# Altium PCB all_Slaveboard_2020.PcbDoc
Units mm, origin at the board's own origin, x right, y up, seen from the top; angles counter-clockwise.
Board outline 150 x 100 mm, 8 copper layers (Top Layer, GND, SIG03, SIG04, Int4 (Sign), SIG06, PWR, Bottom Layer), stack 1.535 mm thick; 98 components, 233 nets, 1115 pads, 5 vias.
Unrouted connection lines stored in the file: 524.
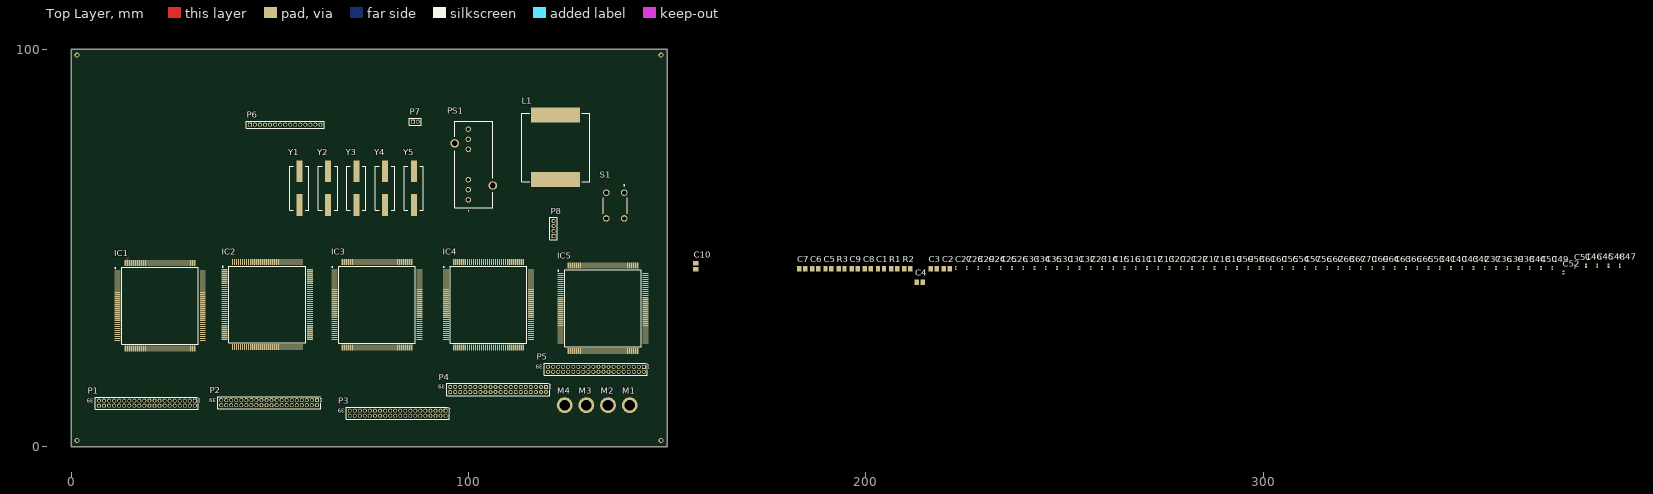
[diagram p0: Top Layer view]
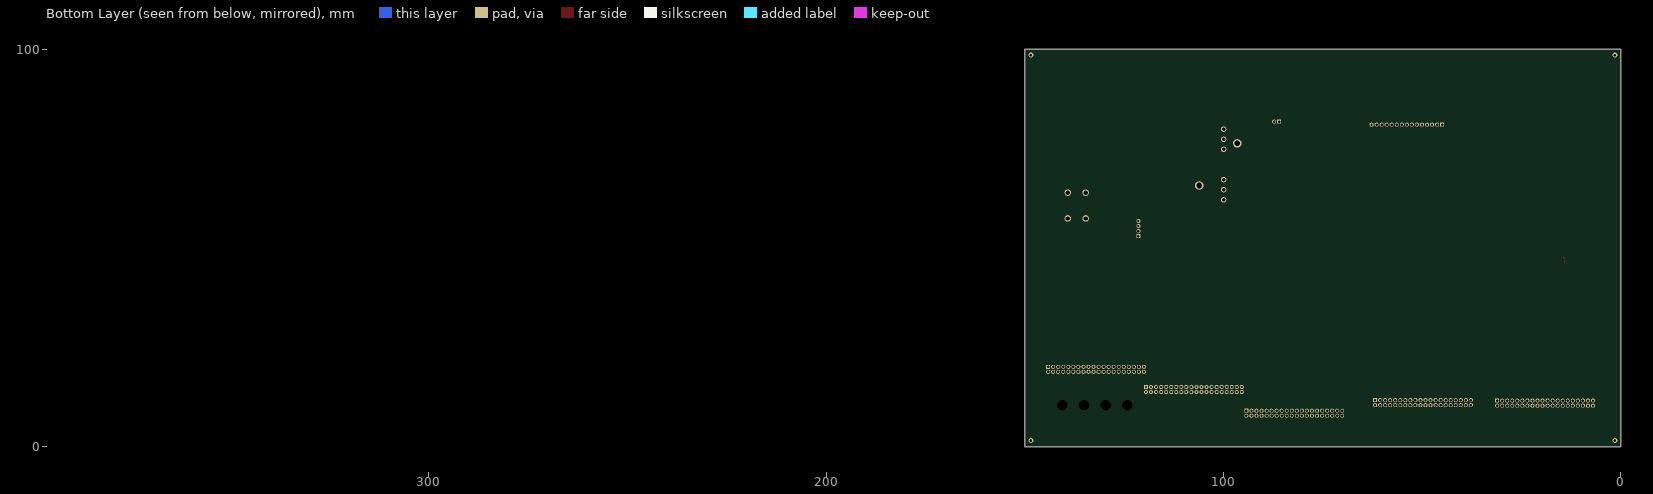
[diagram p1: Bottom Layer view, seen from below]
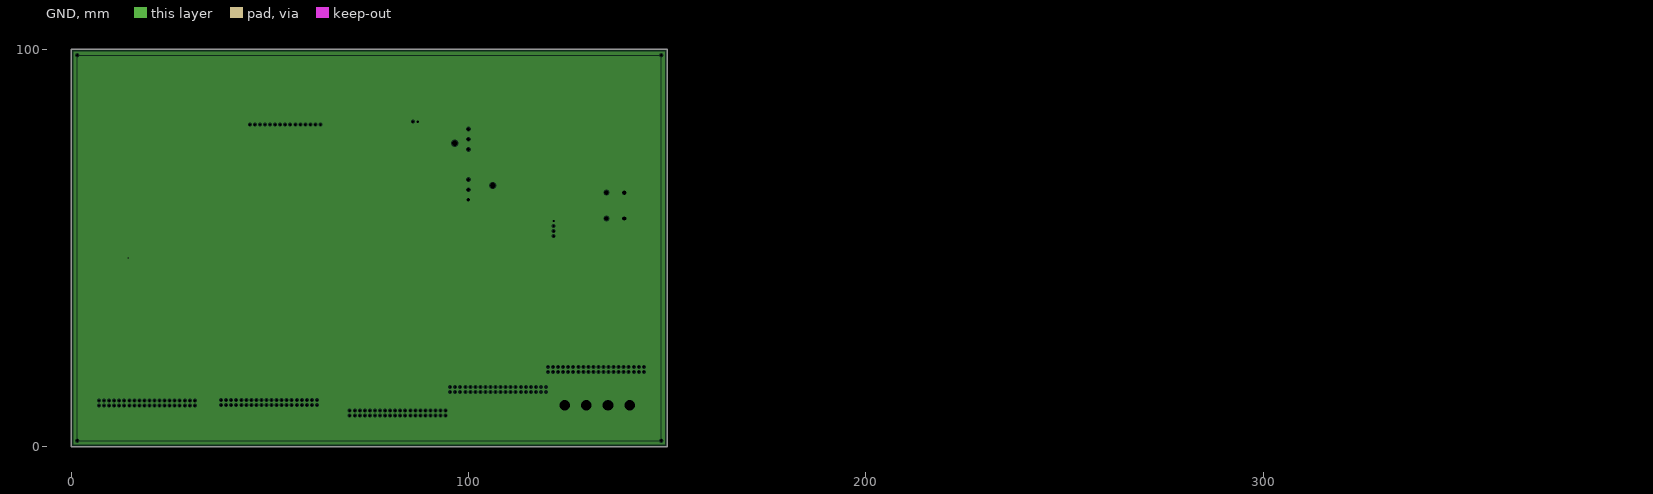
[diagram p2: GND, clearances drawn from the general rule]
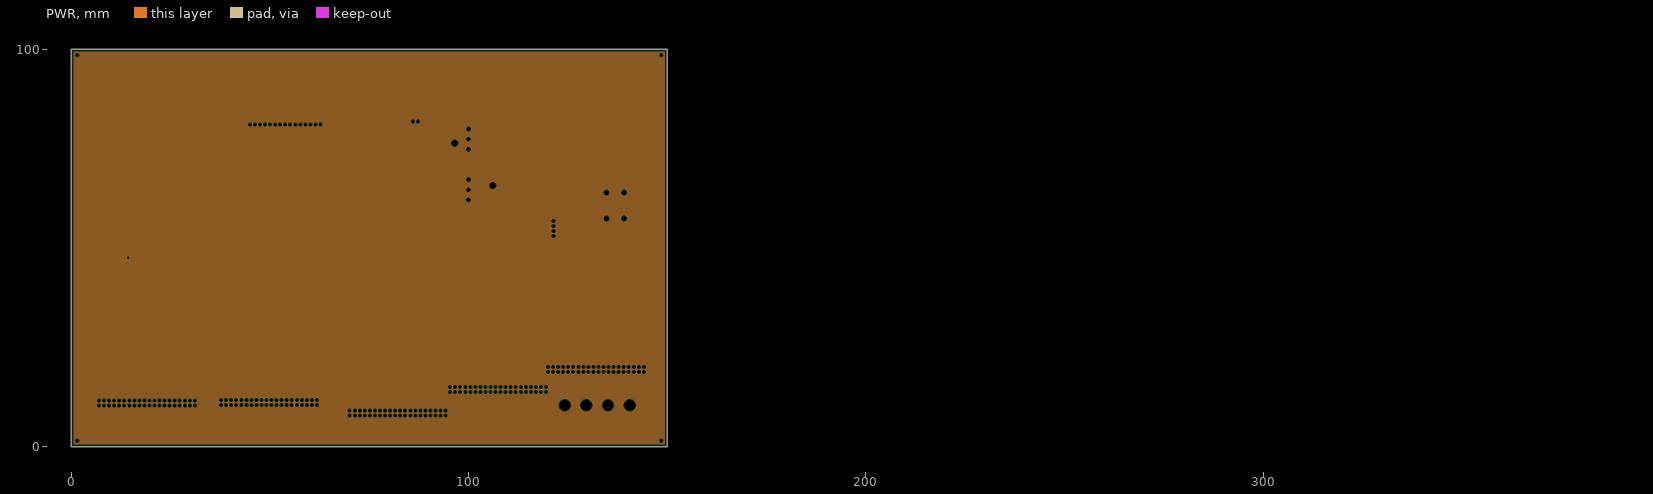
[diagram p3: PWR, clearances drawn from the general rule]

## Layer stack, top to bottom
Top Solder: solder mask 0.0254, SM-001, Dk 4
Top Layer: signal copper 0.035
Dielectric 1: prepreg 0.0711, PP-006, Dk 4.1
Dielectric 2: prepreg 0.0711, PP-006, Dk 4.1
GND: plane copper 0.035, net GND
Dielectric 3: core 0.2286, Core-027, Dk 4.5
SIG03: signal copper 0.035
Dielectric 4: prepreg 0.0711, PP-006, Dk 4.1
Dielectric 5: prepreg 0.0711, PP-006, Dk 4.1
SIG04: signal copper 0.035
Dielectric 6: core 0.2286, Core-027, Dk 4.5
Int4 (Sign): signal copper 0.035
Dielectric 7: prepreg 0.0711, PP-006, Dk 4.1
Dielectric 8: prepreg 0.0711, PP-006, Dk 4.1
SIG06: signal copper 0.035
Dielectric 9: core 0.2286, Core-027, Dk 4.5
PWR: plane copper 0.035
Dielectric 10: prepreg 0.0711, PP-006, Dk 4.1
Dielectric 11: prepreg 0.0711, PP-006, Dk 4.1
Bottom Layer: signal copper 0.035
Bottom Solder: solder mask 0.0254, SM-001, Dk 4

## Board outline
0,0 0,100 150,100 150,0

## Design rules (kind name [scope] priority, off if disabled: settings)
Clearance [istrack>(InDifferentialPairClass('All Differential Pairs')) vs (IsTrack)] p1: gap=0.305 ignorepadtopadclearanceinfootprint=TRUE except(0: Arc-Hole Track-Hole SMDPad-Hole THPad-Hole Via-Hole Fill-Hole Poly-Hole Region-Hole Text-Hole)
Clearance All [All] p2: gap=0.114 ignorepadtopadclearanceinfootprint=TRUE except(0: Arc-Hole Track-Hole SMDPad-Hole THPad-Hole Via-Hole Fill-Hole Poly-Hole Region-Hole Text-Hole)
Clearance Via_Poly [IsVia vs inpoly] p3: gap=0.127 ignorepadtopadclearanceinfootprint=TRUE except(0: Arc-Hole Track-Hole SMDPad-Hole THPad-Hole Via-Hole Fill-Hole Poly-Hole Region-Hole Text-Hole)
Clearance Poly [Isvia vs (InPolygon)] p4: gap=0.254 ignorepadtopadclearanceinfootprint=TRUE except(0: Arc-Hole Track-Hole SMDPad-Hole THPad-Hole Via-Hole Fill-Hole Poly-Hole Region-Hole Text-Hole)
PlaneClearance [All] p1: clearance=0.203
PlaneConnect [All] p1: planeconnectstyle=Relief reliefexpansion=0.152 reliefentries=4 reliefconductorwidth=0.254 reliefairgap=0.203
PolygonConnect [All] p1: connectstyle=Relief reliefconductorwidth=0.254 reliefentries=4 polygonreliefangle="90 Angle" airgapwidth=0.254
PolygonConnect PolygonConnect_Via [IsVia] p2: connectstyle=Direct reliefconductorwidth=0.254 reliefentries=4 polygonreliefangle="90 Angle" airgapwidth=0.254
RoutingVias [All] p1: holewidth=0.2 width=0.4 viastyle="Through Hole" minholewidth=0.2 minwidth=0.4 maxholewidth=0.2 maxwidth=0.4
SolderMaskExpansion [All] p1: expansion=0.102 istentingtop=FALSE
Width Diff_pair [(InDifferentialPairClass('100'))] p1: maxlimit=0.114 minlimit=0.114 preferedwidth=0.114
Width Width_1 [All] p2: maxlimit=1.524 minlimit=0.152 preferedwidth=0.152 minimp=50.000000 maximp=50.000000 favimp=50.000000
Width PWR [InNetClass('PWR')] p3: maxlimit=1.524 minlimit=0.254 preferedwidth=0.305
28 further rules are at their usual default settings.

## Components (designator, comment, footprint, x,y, rotation, side; value= is the part's Value field where it differs from the comment)
C1 "30pF" c0805 203.847,44.791 r0 top
C2 "30pF" c0805 220.403,44.791 r0 top
C3 "30pF" c0805 217.092,44.791 r0 top
C4 "30pF" c0805 213.626,41.402 r0 top
C5 "30pF" c0805 190.602,44.791 r0 top
C6 "30pF" c0805 187.291,44.791 r0 top
C7 "30pF" c0805 183.98,44.791 r0 top
C8 "30pF" c0805 200.536,44.791 r0 top
C9 "30pF" c0805 197.225,44.791 r0 top
C10 "30pF" c0805 157.226,45.339 r90 top
C11 "100nF" c0201 267.967,44.931 r90 top
C12 "100nF" c0201 270.8,44.931 r90 top
C13 "100nF" c0201 273.634,44.931 r90 top
C14 "100nF" c0201 259.465,44.931 r90 top
C15 "100nF" c0201 262.299,44.931 r90 top
C16 "100nF" c0201 265.133,44.931 r90 top
C17 "100nF" c0201 284.97,44.931 r90 top
C18 "100nF" c0201 287.804,44.931 r90 top
C19 "100nF" c0201 290.638,44.931 r90 top
C20 "100nF" c0201 276.468,44.931 r90 top
C21 "100nF" c0201 279.302,44.931 r90 top
C22 "100nF" c0201 282.136,44.931 r90 top
C23 "100nF" c0201 256.631,44.931 r90 top
C24 "100nF" c0201 231.126,44.931 r90 top
C25 "100nF" c0201 233.96,44.931 r90 top
C26 "100nF" c0201 236.794,44.931 r90 top
C27 "100nF" c0201 222.624,44.931 r90 top
C28 "100nF" c0201 225.458,44.931 r90 top
C29 "100nF" c0201 228.292,44.931 r90 top
C30 "100nF" c0201 248.129,44.931 r90 top
C31 "100nF" c0201 250.963,44.931 r90 top
C32 "100nF" c0201 253.797,44.931 r90 top
C33 "100nF" c0201 239.628,44.931 r90 top
C34 "100nF" c0201 242.461,44.931 r90 top
C35 "100nF" c0201 245.295,44.931 r90 top
C36 "100nF" c0201 358.651,44.931 r90 top
C37 "100nF" c0201 355.817,44.931 r90 top
C38 "100nF" c0201 364.319,44.931 r90 top
C39 "100nF" c0201 361.485,44.931 r90 top
C40 "100nF" c0201 347.316,44.931 r90 top
C41 "100nF" c0201 344.482,44.931 r90 top
C42 "100nF" c0201 352.983,44.931 r90 top
C43 "100nF" c0201 350.15,44.931 r90 top
C44 "100nF" c0201 367.153,44.931 r90 top
C45 "100nF" c0201 384.156,45.512 r90 top
C46 "100nF" c0201 381.322,45.512 r90 top
C47 "100nF" c0201 389.824,45.512 r90 top
C48 "100nF" c0201 386.99,45.512 r90 top
C49 "100nF" c0201 372.821,44.931 r90 top
C50 "100nF" c0201 369.987,44.931 r90 top
C51 "100nF" c0201 378.489,45.385 r90 top
C52 "100nF" c0201 375.655,43.788 r90 top
C53 "100nF" c0201 341.648,44.931 r90 top
C54 "100nF" c0201 307.641,44.931 r90 top
C55 "100nF" c0201 304.807,44.931 r90 top
C56 "100nF" c0201 313.309,44.931 r90 top
C57 "100nF" c0201 310.475,44.931 r90 top
C58 "100nF" c0201 296.306,44.931 r90 top
C59 "100nF" c0201 293.472,44.931 r90 top
C60 "100nF" c0201 301.973,44.931 r90 top
C61 "100nF" c0201 299.139,44.931 r90 top
C62 "100nF" c0201 316.143,44.931 r90 top
C63 "100nF" c0201 333.146,44.931 r90 top
C64 "100nF" c0201 330.312,44.931 r90 top
C65 "100nF" c0201 338.814,44.931 r90 top
C66 "100nF" c0201 335.98,44.931 r90 top
C67 "1nF" c0201 321.811,44.931 r90 top
C68 "1nF" c0201 318.977,44.931 r90 top value=10uF
C69 "1nF" c0201 327.478,44.931 r90 top
C70 "1nF" c0201 324.645,44.931 r90 top
IC1 "STM32F303ZET6" f303QFP50P2200X2200X160-144N 22.352,35.433 r0 top
IC2 "STM32F303ZET6" f303QFP50P2200X2200X160-144N 49.333,35.747 r0 top
IC3 "STM32F303ZET6" f303QFP50P2200X2200X160-144N 76.962,35.687 r0 top
IC4 "STM32F303ZET6" f303QFP50P2200X2200X160-144N 105.029,35.687 r0 top
IC5 "STM32F303ZET6" f303QFP50P2200X2200X160-144N 133.858,34.798 r0 top
L1 "IHLP6767GZER220M01" FP-IHLP-6767GZ-FP_3_825x1-MFG 121.92,75.311 r90 top
M1 "HOLE2R7-4" HOLE2R7-4 140.589,10.414 r0 top
M2 "HOLE2R7-4" HOLE2R7-4 135.128,10.414 r0 top
M3 "HOLE2R7-4" HOLE2R7-4 129.667,10.414 r0 top
M4 "HOLE2R7-4" HOLE2R7-4 124.206,10.414 r0 top
P1 "MHDR2X20" MHDR2X20 31.115,11.557 r180 top
P2 "MHDR2X20" MHDR2X20 61.849,11.684 r180 top
P3 "MHDR2X20" MHDR2X20 94.234,9.017 r180 top
P4 "MHDR2X20" MHDR2X20 119.507,14.986 r180 top
P5 "MHDR2X20" MHDR2X20 144.145,20.066 r180 top
P6 "MHDR1X15" MHDR1X15 44.958,81.026 r0 top
P7 "MHDR1X2" MHDR1X2 85.979,81.788 r0 top
P8 "MHDR1X4" MHDR1X4 121.412,52.959 r90 top
PS1 "TMR_6-2415WIR" TMR62410WIR 99.949,62.103 r90 top
R1 "10K" C0805 207.158,44.791 r0 top value=100K
R2 "10K" C0805 210.469,44.791 r0 top
R3 "10k" C0805 193.913,44.791 r0 top
S1 "B3F-1025" B3F1025 139.192,63.904 r90 top
Y1 "ATS08ASM-1E" ATS040SM1 57.404,65.024 r90 top
Y2 "ATS08ASM-1E" ATS040SM1 64.643,65.024 r90 top
Y3 "ATS08ASM-1E" ATS040SM1 71.755,65.024 r90 top
Y4 "ATS08ASM-1E" ATS040SM1 78.994,65.024 r90 top
Y5 "ATS08ASM-1E" ATS040SM1 86.233,65.024 r90 top

## Footprints (in the part's own frame and the unit in brackets; to place one, negate y for a bottom-side part, rotate by r counter-clockwise, add the part's x,y. Pads: shape width x height; smd on the part's side, far side on the other; paste and mask are expansions set on the pad)
ATS040SM1 [mm]
  rect 5.5x1.5 smd: 1(-4.25,0) 2(4.25,0)
  silkscreen extent -5.55,-2.41 5.55,2.41, body extent -6.85,-2.41 6.85,2.41, height 4.4
B3F1025 [mm]
  round 1.65 hole 1.1: 1(0,0) 2(-6.5,0) 3(0,4.5) 4(-6.5,4.5)
  silkscreen extent -5.25,-0.75 1.95,5.25, body extent -6.95,-0.75 0.45,5.25, height 5.3
c0201 [mm]
  rect 0.46x0.42 smd: 1(-0.3,0) 2(0.33,0)
  body extent -0.3,-0.15 0.3,0.15, height 0.33
c0805 [mm] "Chip Capacitor, Body 2.0x1.3mm, IPC High Density"
  rect 1.1x1.4 smd: 1(-0.75,0) 2(0.75,0)
  body extent -1.1,-0.72 1.1,0.72, height 1.4
C0805 [mm] "Chip Capacitor, Body 2.0x1.3mm, IPC High Density"
  rect 1.1x1.4 smd: 1(-0.75,0) 2(0.75,0)
  body extent -1.1,-0.72 1.1,0.72, height 1.4
f303QFP50P2200X2200X160-144N [mm]
  rect 1.475x0.3 smd: 1(-10.738,8.75) 2(-10.738,8.25) 3(-10.738,7.75) 4(-10.738,7.25) 5(-10.738,6.75) 6(-10.738,6.25) 7(-10.738,5.75) 8(-10.738,5.25) 9(-10.738,4.75) 10(-10.738,4.25) 11(-10.738,3.75) 12(-10.738,3.25) 13(-10.738,2.75) 14(-10.738,2.25) 15(-10.738,1.75) 16(-10.738,1.25) 17(-10.738,0.75) 18(-10.738,0.25) 19(-10.738,-0.25) 20(-10.738,-0.75) 21(-10.738,-1.25) 22(-10.738,-1.75) 23(-10.738,-2.25) 24(-10.738,-2.75) 25(-10.738,-3.25) 26(-10.738,-3.75) 27(-10.738,-4.25) 28(-10.738,-4.75) 29(-10.738,-5.25) 30(-10.738,-5.75) 31(-10.738,-6.25) 32(-10.738,-6.75) 33(-10.738,-7.25) 34(-10.738,-7.75) 35(-10.738,-8.25) 36(-10.738,-8.75) 73(10.738,-8.75) 74(10.738,-8.25) 75(10.738,-7.75) 76(10.738,-7.25) 77(10.738,-6.75) 78(10.738,-6.25) 79(10.738,-5.75) 80(10.738,-5.25) 81(10.738,-4.75) 82(10.738,-4.25) 83(10.738,-3.75) 84(10.738,-3.25) 85(10.738,-2.75) 86(10.738,-2.25) 87(10.738,-1.75) 88(10.738,-1.25) 89(10.738,-0.75) 90(10.738,-0.25) 91(10.738,0.25) 92(10.738,0.75) 93(10.738,1.25) 94(10.738,1.75) 95(10.738,2.25) 96(10.738,2.75) 97(10.738,3.25) 98(10.738,3.75) 99(10.738,4.25) 100(10.738,4.75) 101(10.738,5.25) 102(10.738,5.75) 103(10.738,6.25) 104(10.738,6.75) 105(10.738,7.25) 106(10.738,7.75) 107(10.738,8.25) 108(10.738,8.75)
  rect 0.3x1.475 smd: 37(-8.75,-10.738) 38(-8.25,-10.738) 39(-7.75,-10.738) 40(-7.25,-10.738) 41(-6.75,-10.738) 42(-6.25,-10.738) 43(-5.75,-10.738) 44(-5.25,-10.738) 45(-4.75,-10.738) 46(-4.25,-10.738) 47(-3.75,-10.738) 48(-3.25,-10.738) 49(-2.75,-10.738) 50(-2.25,-10.738) 51(-1.75,-10.738) 52(-1.25,-10.738) 53(-0.75,-10.738) 54(-0.25,-10.738) 55(0.25,-10.738) 56(0.75,-10.738) 57(1.25,-10.738) 58(1.75,-10.738) 59(2.25,-10.738) 60(2.75,-10.738) 61(3.25,-10.738) 62(3.75,-10.738) 63(4.25,-10.738) 64(4.75,-10.738) 65(5.25,-10.738) 66(5.75,-10.738) 67(6.25,-10.738) 68(6.75,-10.738) 69(7.25,-10.738) 70(7.75,-10.738) 71(8.25,-10.738) 72(8.75,-10.738) 109(8.75,10.738) 110(8.25,10.738) 111(7.75,10.738) 112(7.25,10.738) 113(6.75,10.738) 114(6.25,10.738) 115(5.75,10.738) 116(5.25,10.738) 117(4.75,10.738) 118(4.25,10.738) 119(3.75,10.738) 120(3.25,10.738) 121(2.75,10.738) 122(2.25,10.738) 123(1.75,10.738) 124(1.25,10.738) 125(0.75,10.738) 126(0.25,10.738) 127(-0.25,10.738) 128(-0.75,10.738) 129(-1.25,10.738) 130(-1.75,10.738) 131(-2.25,10.738) 132(-2.75,10.738) 133(-3.25,10.738) 134(-3.75,10.738) 135(-4.25,10.738) 136(-4.75,10.738) 137(-5.25,10.738) 138(-5.75,10.738) 139(-6.25,10.738) 140(-6.75,10.738) 141(-7.25,10.738) 142(-7.75,10.738) 143(-8.25,10.738) 144(-8.75,10.738)
  silkscreen extent -11.35,-9.65 9.65,9.65, body extent -11,-11 11,11, height 1.6
FP-IHLP-6767GZ-FP_3_825x1-MFG [mm]
  rect 3.825x12.32 smd paste+0 mask+0: 1(-8.117,0) 2(8.117,0)
  silkscreen extent -8.64,-8.57 8.64,8.57, body extent -10.13,-8.67 10.13,8.67, height 0.25
HOLE2R7-4 [mm] "HOLE2R7-4"
  round 4 / inner round 1.524 / far side round 1.524 hole 2.7: 1(0,0)
MHDR1X2 [mm] "Connector; Header; 2 Position"
  rect 1x1 hole 0.6: 1(0,0)
  round 1 hole 0.6: 2(1.27,0)
  silkscreen extent -0.9,-0.9 2.17,0.9
MHDR1X4 [mm] "Connector; Header; 4 Position"
  rect 1x1 hole 0.6: 1(0,0)
  round 1 hole 0.6: 2(1.27,0) 3(2.54,0) 4(3.81,0)
  silkscreen extent -0.9,-0.9 4.71,0.9
MHDR1X15 [mm] "Connector; Header; 15 Position"
  rect 1x1 hole 0.6: 1(0,0)
  round 1 hole 0.6: 2(1.27,0) 3(2.54,0) 4(3.81,0) 5(5.08,0) 6(6.35,0) 7(7.62,0) 8(8.89,0) 9(10.16,0) 10(11.43,0) 11(12.7,0) 12(13.97,0) 13(15.24,0) 14(16.51,0) 15(17.78,0)
  silkscreen extent -0.9,-0.9 18.68,0.9
MHDR2X20 [mm] "Connector; Header; 20x2 Position"
  rect 1x1 hole 0.6: 1(0,0)
  round 1 hole 0.6: 2(0,1.27) 3(1.27,0) 4(1.27,1.27) 5(2.54,0) 6(2.54,1.27) 7(3.81,0) 8(3.81,1.27) 9(5.08,0) 10(5.08,1.27) 11(6.35,0) 12(6.35,1.27) 13(7.62,0) 14(7.62,1.27) 15(8.89,0) 16(8.89,1.27) 17(10.16,0) 18(10.16,1.27) 19(11.43,0) 20(11.43,1.27) 21(12.7,0) 22(12.7,1.27) 23(13.97,0) 24(13.97,1.27) 25(15.24,0) 26(15.24,1.27) 27(16.51,0) 28(16.51,1.27) 29(17.78,0) 30(17.78,1.27) 31(19.05,0) 32(19.05,1.27) 33(20.32,0) 34(20.32,1.27) 35(21.59,0) 36(21.59,1.27) 37(22.86,0) 38(22.86,1.27) 39(24.13,0) 40(24.13,1.27)
  silkscreen extent -0.9,-0.9 25.03,2.17
TMR62410WIR [mm]
  round 1.349 hole 0.83: 1(0,0) 2(2.54,0) 3(5.08,0) 6(12.7,0) 7(15.24,0) 8(17.78,0)
  round 2.145 hole 1.43: 9(3.6,-6.175) 10(14.2,3.425)
  silkscreen extent -2.8,-6.17 19.8,3.42, body extent -2.12,-5.95 19.72,3.75, height 14.7

## Part data
C1 C2 C3 C4 C5 C6 C7 C8 C9 C10: library part CP1
C11 C12 C13 C14 C15 C16 C17 C18 C19 C20 C21 C22 C23 C24 C25 C26 C27 C28 C29 C30 C31 C32 C33 C34 C35 C36 C37 C38 C39 C40 C41 C42 C43 C44 C45 C46 C47 C48 C49 C50 C51 C52 C53 C54 C55 C56 C57 C58 C59 C60 C61 C62 C63 C64 C65: library part Cap_0805
C66 C67 C68 C69 C70: library part C
L1: library part CMP-02424-000149-1, "Commercial Inductors, High Saturation Series 22uH 11A 26.5mΩ 20%", Case/Package=6767, Current Rating=11A, DC Resistance (DCR)=26.5mR, Inductance=22uH, Inductance Tolerance=20%, Max DC Current=23A, Max Operating Temperature=125°C, Min Operating Temperature=-55°C, Package Quantity=200, Self Resonant Frequency=2MHz, Test Frequency=100kHz, Core Material=Metal, Depth=17.15mm, Height=7mm, Height - Seated (Max)=0.157inch, Lead Free="Lead Free", Length=17.15mm, Military Standard=Not, Mount="Surface Mount", Packaging="Tape and Reel", Radiation Hardening=No, RMS Current (Irms)=11A, Saturation Current=23A, Shielding=Shielded, Termination=SMD/SMT, Tolerance=20%, Width=0.675inch
P1 P2 P3 P4 P5: "Header, 20-Pin, Dual row", LatestRevisionDate=17-Jul-2002, LatestRevisionNote="Re-released for DXP Platform.", Publisher="Altium Limited"
P6: "Header, 15-Pin", LatestRevisionDate=17-Jul-2002, LatestRevisionNote="Re-released for DXP Platform.", Publisher="Altium Limited"
P7: "Header, 2-Pin", LatestRevisionDate=17-Jul-2002, LatestRevisionNote="Re-released for DXP Platform.", Publisher="Altium Limited"
P8: "Header, 4-Pin", LatestRevisionDate=17-Jul-2002, LatestRevisionNote="Re-released for DXP Platform.", Publisher="Altium Limited"
PS1: "Power Supply", Manufacturer_Name="Traco Power", Manufacturer_Part_Number="TMR 6-2415WIR", Mouser Part Number=495-TMR6-2415WIR, Datasheet Link="https://componentsearchengine.com/Datasheets/2/TMR 6-2415WIR.pdf", Height=11.7mm, Mouser Price/Stock=https://www.mouser.co.uk/ProductDetail/TRACO-Power/TMR-6-2415WIR?qs=y6ZabgHbY%252ByrRGfp%2FzTT2Q%3D%3D
R1 R2 R3: library part R
S1: "Switch", Manufacturer_Name="Omron Electronics", Mouser Part Number=653-B3F-1025, Datasheet Link=http://uk.rs-online.com/web/p/products/6821140, Height=5.2mm, Manufacturer_Part_Number=B3F-1025, Mouser Price/Stock=https://www.mouser.co.uk/ProductDetail/Omron-Electronics/B3F-1025?qs=1tDaWCEHQQ7ZoQQuZXPfLw%3D%3D
Y1 Y2 Y3 Y4 Y5: "Crystal or Oscillator", Manufacturer_Name=CTS, Mouser Part Number=774-ATS08ASM-1E, Arrow Part Number=ATS08ASM-1E, Arrow Price/Stock=https://www.arrow.com/en/products/ats08asm-1e/cts, Datasheet Link=https://www.ctscorp.com/wp-content/uploads/ATS-ATSSM.pdf, Height=4.3mm, Manufacturer_Part_Number=ATS08ASM-1E, Mouser Price/Stock=https://www.mouser.co.uk/ProductDetail/CTS-Electronic-Components/ATS08ASM-1E/?qs=tjlMjqRIEYSoOC%2FyJ4%2Frjw%3D%3D

## Via types
v1: diameter 1.27, hole 0.711, Top Layer to Bottom Layer, 4 vias
v2: diameter 0.4, hole 0.2, Top Layer to Bottom Layer, 1 vias

## Nets (pads, with @x,y where several pads share a name; then routed paths per layer and width w, separated by ;. In a path a pad name is that pad's centre, name@x,y a point inside that pad or via, vN(x,y) a via of type N, cw(c..) or ccw(c..) an arc to the next point about the centre after c; other vN are vias at no path point)
1_AD1_IN1: IC1.34 P1.1
1_AD1_IN2: IC1.35 P1.3
1_AD1_IN3: IC1.36 P1.5
1_AD1_IN4: IC1.37 P1.7
1_AD1_IN5: IC1.14 P1.9
1_AD1_IN6: IC1.26 P1.11
1_AD1_IN7: IC1.27 P1.13
1_AD1_IN8: IC1.28 P1.15
1_AD1_IN9: IC1.29 P1.17
1_AD1_IN10: IC1.12 P1.19
1_AD1_IN14: IC1.70 P1.21
1_AD2_IN1: IC1.40 P1.23
1_AD2_IN2: IC1.41 P1.25
1_AD2_IN3: IC1.42 P1.27
1_AD2_IN4: IC1.43 P1.29
1_AD2_IN5: IC1.44 P1.31
1_AD2_IN11: IC1.45 P1.33
1_AD2_IN12: IC1.48 P1.35
1_AD3_IN1: IC1.47 P1.37
1_AD3_IN2: IC1.60 P1.39
1_AD3_IN3: IC1.66 P1.2
1_AD3_IN5: IC1.74 P1.4
1_AD3_IN6: IC1.59 P1.6
1_AD3_IN7: IC1.79 P1.8
1_AD3_IN8: IC1.80 P1.10
1_AD3_IN9: IC1.81 P1.12
1_AD3_IN10: IC1.82 P1.14
1_AD3_IN11: IC1.85 P1.16
1_AD3_IN12: IC1.46 P1.18
1_AD3_IN13: IC1.58 P1.20
1_AD3_IN14: IC1.63 P1.22
1_AD3_IN15: IC1.64 P1.24
1_AD3_IN16: IC1.65 P1.26
1_AD4_IN1: IC1.67 P1.28
1_AD4_IN2: IC1.68 P1.30
1_AD4_IN3: IC1.73 P1.32
1_AD4_IN4: IC1.75 P1.34
1_AD4_IN5: IC1.76 P1.36
1_AD4_IN12: IC1.77 P1.38
1_AD4_IN13: IC1.78 P1.40
1_BOOT0: IC1.138 IC2.138 IC3.138 IC4.138 IC5.138 R1.2
1_NRST: C66.1 IC1.25 IC2.25 IC3.25 IC4.25 IC5.25 R2.1 S1.3 S1.4
1_SPI_MISO: IC1.134 P6.2
1_SPI_MOSI: IC1.135 P6.3
1_SPI_SCK: IC1.133 P6.1
1_SWCLK: IC1.109 IC2.109 IC3.109 IC4.109 IC5.109 P8.1
1_SWDIO: IC1.105 IC2.105 IC3.105 IC4.105 IC5.105 P8.2 R3.2
2_AD1_IN1: IC2.34 P2.1
2_AD1_IN2: IC2.35 P2.3
2_AD1_IN3: IC2.36 P2.5
2_AD1_IN4: IC2.37 P2.7
2_AD1_IN5: IC2.14 P2.9
2_AD1_IN6: IC2.26 P2.11
2_AD1_IN7: IC2.27 P2.13
2_AD1_IN8: IC2.28 P2.15
2_AD1_IN9: IC2.29 P2.17
2_AD1_IN10: IC2.12 P2.19
2_AD1_IN14: IC2.70 P2.21
2_AD2_IN1: IC2.40 P2.23
2_AD2_IN2: IC2.41 P2.25
2_AD2_IN3: IC2.42 P2.27
2_AD2_IN4: IC2.43 P2.29
2_AD2_IN5: IC2.44 P2.31
2_AD2_IN11: IC2.45 P2.33
2_AD2_IN12: IC2.48 P2.35
2_AD3_IN1: IC2.47 P2.37
2_AD3_IN2: IC2.60 P2.39
2_AD3_IN3: IC2.66 P2.2
2_AD3_IN5: IC2.74 P2.4
2_AD3_IN6: IC2.59 P2.6
2_AD3_IN7: IC2.79 P2.8
2_AD3_IN8: IC2.80 P2.10
2_AD3_IN9: IC2.81 P2.12
2_AD3_IN10: IC2.82 P2.14
2_AD3_IN11: IC2.85 P2.16
2_AD3_IN12: IC2.46 P2.18
2_AD3_IN13: IC2.58 P2.20
2_AD3_IN14: IC2.63 P2.22
2_AD3_IN15: IC2.64 P2.24
2_AD3_IN16: IC2.65 P2.26
2_AD4_IN1: IC2.67 P2.28
2_AD4_IN2: IC2.68 P2.30
2_AD4_IN3: IC2.73 P2.32
2_AD4_IN4: IC2.75 P2.34
2_AD4_IN5: IC2.76 P2.36
2_AD4_IN12: IC2.77 P2.38
2_AD4_IN13: IC2.78 P2.40
2_SPI_MISO: IC2.134 P6.5
2_SPI_MOSI: IC2.135 P6.6
2_SPI_SCK: IC2.133 P6.4
3.3V: C11.1 C12.1 C13.1 C14.1 C15.1 C16.1 C17.1 C18.1 C19.1 C20.1 C21.1 C22.1 C23.1 C24.1 C25.1 C26.1 C27.1 C28.1 C29.1 C30.1 C31.1 C32.1 C33.1 C34.1 C35.1 C36.1 C37.1 C38.1 C39.1 C40.1 C41.1 C42.1 C43.1 C44.1 C45.1 C46.1 C47.1 C48.1 C49.1 C50.1 C51.1 C52.1 C53.1 C54.1 C55.1 C56.1 C57.1 C58.1 C59.1 C60.1 C61.1 C62.1 C63.1 C64.1 C65.1 C69.2 C70.2 IC1.17 IC1.32 IC1.33 IC1.39 IC1.52 IC1.62 IC1.72 IC1.84 IC1.95 IC1.108 IC1.121 IC1.131 IC1.144 IC2.17 IC2.32 IC2.33 IC2.39 IC2.52 IC2.62 IC2.72 IC2.84 IC2.95 IC2.108 IC2.121 IC2.131 IC2.144 IC3.17 IC3.32 IC3.33 IC3.39 IC3.52 IC3.62 IC3.72 IC3.84 IC3.95 IC3.108 IC3.121 IC3.131 IC3.144 IC4.17 IC4.32 IC4.33 IC4.39 IC4.52 IC4.62 IC4.72 IC4.84 IC4.95 IC4.108 IC4.121 IC4.131 IC4.144 IC5.17 IC5.32 IC5.33 IC5.39 IC5.52 IC5.62 IC5.72 IC5.84 IC5.95 IC5.108 IC5.121 IC5.131 IC5.144 P8.3 PS1.6 R2.2 R3.1
3_AD1_IN1: IC3.34 P3.1
3_AD1_IN2: IC3.35 P3.3
3_AD1_IN3: IC3.36 P3.5
3_AD1_IN4: IC3.37 P3.7
3_AD1_IN5: IC3.14 P3.9
3_AD1_IN6: IC3.26 P3.11
3_AD1_IN7: IC3.27 P3.13
3_AD1_IN8: IC3.28 P3.15
3_AD1_IN9: IC3.29 P3.17
3_AD1_IN10: IC3.12 P3.19
3_AD1_IN14: IC3.70 P3.21
3_AD2_IN1: IC3.40 P3.23
3_AD2_IN2: IC3.41 P3.25
3_AD2_IN3: IC3.42 P3.27
3_AD2_IN4: IC3.43 P3.29
3_AD2_IN5: IC3.44 P3.31
3_AD2_IN11: IC3.45 P3.33
3_AD2_IN12: IC3.48 P3.35
3_AD3_IN1: IC3.47 P3.37
3_AD3_IN2: IC3.60 P3.39
3_AD3_IN3: IC3.66 P3.2
3_AD3_IN5: IC3.74 P3.4
3_AD3_IN6: IC3.59 P3.6
3_AD3_IN7: IC3.79 P3.8
3_AD3_IN8: IC3.80 P3.10
3_AD3_IN9: IC3.81 P3.12
3_AD3_IN10: IC3.82 P3.14
3_AD3_IN11: IC3.85 P3.16
3_AD3_IN12: IC3.46 P3.18
3_AD3_IN13: IC3.58 P3.20
3_AD3_IN14: IC3.63 P3.22
3_AD3_IN15: IC3.64 P3.24
3_AD3_IN16: IC3.65 P3.26
3_AD4_IN1: IC3.67 P3.28
3_AD4_IN2: IC3.68 P3.30
3_AD4_IN3: IC3.73 P3.32
3_AD4_IN4: IC3.75 P3.34
3_AD4_IN5: IC3.76 P3.36
3_AD4_IN12: IC3.77 P3.38
3_AD4_IN13: IC3.78 P3.40
3_SPI_MISO: IC3.134 P6.8
3_SPI_MOSI: IC3.135 P6.9
3_SPI_SCK: IC3.133 P6.7
4_AD1_IN1: IC4.34 P4.1
4_AD1_IN2: IC4.35 P4.3
4_AD1_IN3: IC4.36 P4.5
4_AD1_IN4: IC4.37 P4.7
4_AD1_IN5: IC4.14 P4.9
4_AD1_IN6: IC4.26 P4.11
4_AD1_IN7: IC4.27 P4.13
4_AD1_IN8: IC4.28 P4.15
4_AD1_IN9: IC4.29 P4.17
4_AD1_IN10: IC4.12 P4.19
4_AD1_IN14: IC4.70 P4.21
4_AD2_IN1: IC4.40 P4.23
4_AD2_IN2: IC4.41 P4.25
4_AD2_IN3: IC4.42 P4.27
4_AD2_IN4: IC4.43 P4.29
4_AD2_IN5: IC4.44 P4.31
4_AD2_IN11: IC4.45 P4.33
4_AD2_IN12: IC4.48 P4.35
4_AD3_IN1: IC4.47 P4.37
4_AD3_IN2: IC4.60 P4.39
4_AD3_IN3: IC4.66 P4.2
4_AD3_IN5: IC4.74 P4.4
4_AD3_IN6: IC4.59 P4.6
4_AD3_IN7: IC4.79 P4.8
4_AD3_IN8: IC4.80 P4.10
4_AD3_IN9: IC4.81 P4.12
4_AD3_IN10: IC4.82 P4.14
4_AD3_IN11: IC4.85 P4.16
4_AD3_IN12: IC4.46 P4.18
4_AD3_IN13: IC4.58 P4.20
4_AD3_IN14: IC4.63 P4.22
4_AD3_IN15: IC4.64 P4.24
4_AD3_IN16: IC4.65 P4.26
4_AD4_IN1: IC4.67 P4.28
4_AD4_IN2: IC4.68 P4.30
4_AD4_IN3: IC4.73 P4.32
4_AD4_IN4: IC4.75 P4.34
4_AD4_IN5: IC4.76 P4.36
4_AD4_IN12: IC4.77 P4.38
4_AD4_IN13: IC4.78 P4.40
4_SPI_MISO: IC4.134 P6.11
4_SPI_MOSI: IC4.135 P6.12
4_SPI_SCK: IC4.133 P6.10
5_AD1_IN1: IC5.34 P5.1
5_AD1_IN2: IC5.35 P5.3
5_AD1_IN3: IC5.36 P5.5
5_AD1_IN4: IC5.37 P5.7
5_AD1_IN5: IC5.14 P5.9
5_AD1_IN6: IC5.26 P5.11
5_AD1_IN7: IC5.27 P5.13
5_AD1_IN8: IC5.28 P5.15
5_AD1_IN9: IC5.29 P5.17
5_AD1_IN10: IC5.12 P5.19
5_AD1_IN14: IC5.70 P5.21
5_AD2_IN1: IC5.40 P5.23
5_AD2_IN2: IC5.41 P5.25
5_AD2_IN3: IC5.42 P5.27
5_AD2_IN4: IC5.43 P5.29
5_AD2_IN5: IC5.44 P5.31
5_AD2_IN11: IC5.45 P5.33
5_AD2_IN12: IC5.48 P5.35
5_AD3_IN1: IC5.47 P5.37
5_AD3_IN2: IC5.60 P5.39
5_AD3_IN3: IC5.66 P5.2
5_AD3_IN5: IC5.74 P5.4
5_AD3_IN6: IC5.59 P5.6
5_AD3_IN7: IC5.79 P5.8
5_AD3_IN8: IC5.80 P5.10
5_AD3_IN9: IC5.81 P5.12
5_AD3_IN10: IC5.82 P5.14
5_AD3_IN11: IC5.85 P5.16
5_AD3_IN12: IC5.46 P5.18
5_AD3_IN13: IC5.58 P5.20
5_AD3_IN14: IC5.63 P5.22
5_AD3_IN15: IC5.64 P5.24
5_AD3_IN16: IC5.65 P5.26
5_AD4_IN1: IC5.67 P5.28
5_AD4_IN2: IC5.68 P5.30
5_AD4_IN3: IC5.73 P5.32
5_AD4_IN4: IC5.75 P5.34
5_AD4_IN5: IC5.76 P5.36
5_AD4_IN12: IC5.77 P5.38
5_AD4_IN13: IC5.78 P5.40
5_SPI_MISO: IC5.134 P6.14
5_SPI_MOSI: IC5.135 P6.15
5_SPI_SCK: IC5.133 P6.13
GND: C1.2 C2.2 C3.2 C4.2 C5.2 C6.2 C7.2 C8.2 C9.2 C10.2 C11.2 C12.2 C13.2 C14.2 C15.2 C16.2 C17.2 C18.2 C19.2 C20.2 C21.2 C22.2 C23.2 C24.2 C25.2 C26.2 C27.2 C28.2 C29.2 C30.2 C31.2 C32.2 C33.2 C34.2 C35.2 C36.2 C37.2 C38.2 C39.2 C40.2 C41.2 C42.2 C43.2 C44.2 C45.2 C46.2 C47.2 C48.2 C49.2 C50.2 C51.2 C52.2 C53.2 C54.2 C55.2 C56.2 C57.2 C58.2 C59.2 C60.2 C61.2 C62.2 C63.2 C64.2 C65.2 C66.2 C67.1 C68.1 C69.1 IC1.16 IC1.30 IC1.31 IC1.38 IC1.51 IC1.61 IC1.71 IC1.83 IC1.94 IC1.107 IC1.120 IC1.130 IC1.143 IC2.16 IC2.30 IC2.31 IC2.38 IC2.51 IC2.61 IC2.71 IC2.83 IC2.94 IC2.107 IC2.120 IC2.130 IC2.143 IC3.16 IC3.30 IC3.31 IC3.38 IC3.51 IC3.61 IC3.71 IC3.83 IC3.94 IC3.107 IC3.120 IC3.130 IC3.143 IC4.16 IC4.30 IC4.31 IC4.38 IC4.51 IC4.61 IC4.71 IC4.83 IC4.94 IC4.107 IC4.120 IC4.130 IC4.143 IC5.16 IC5.30 IC5.31 IC5.38 IC5.51 IC5.61 IC5.71 IC5.83 IC5.94 IC5.107 IC5.120 IC5.130 IC5.143 L1.1 L1.2 M1.1 M2.1 M3.1 M4.1 P7.2 P8.4 PS1.1 R1.1 S1.1 S1.2 | length 1.4
  Top Layer w0.152: IC1.143 14.102,47.249 v2(14.351,47.498)
NetC1_1: C1.1 IC1.23 Y1.1
NetC2_1: C2.1 IC1.24 Y1.2
NetC3_1: C3.1 IC2.23 Y2.1
NetC4_1: C4.1 IC2.24 Y2.2
NetC5_1: C5.1 IC3.23 Y3.1
NetC6_1: C6.1 IC3.24 Y3.2
NetC7_1: C7.1 IC4.23 Y4.1
NetC8_1: C8.1 IC4.24 Y4.2
NetC9_1: C9.1 IC5.23 Y5.1
NetC10_1: C10.1 IC5.24 Y5.2
NetC67_2: C67.2 PS1.7
NetC68_2: C68.2 C70.1 P7.1 PS1.2
pads on no net: IC1.1 IC1.2 IC1.3 IC1.4 IC1.5 IC1.6 IC1.7 IC1.8 IC1.9 IC1.10 IC1.11 IC1.13 IC1.15 IC1.18 IC1.19 IC1.20 IC1.21 IC1.22 IC1.49 IC1.50 IC1.53 IC1.54 IC1.55 IC1.56 IC1.57 IC1.69 IC1.86 IC1.87 IC1.88 IC1.89 IC1.90 IC1.91 IC1.92 IC1.93 IC1.96 IC1.97 IC1.98 IC1.99 IC1.100 IC1.101 IC1.102 IC1.103 IC1.104 IC1.106 IC1.110 IC1.111 IC1.112 IC1.113 IC1.114 IC1.115 IC1.116 IC1.117 IC1.118 IC1.119 IC1.122 IC1.123 IC1.124 IC1.125 IC1.126 IC1.127 IC1.128 IC1.129 IC1.132 IC1.136 IC1.137 IC1.139 IC1.140 IC1.141 IC1.142 IC2.1 IC2.2 IC2.3 IC2.4 IC2.5 IC2.6 IC2.7 IC2.8 IC2.9 IC2.10 IC2.11 IC2.13 IC2.15 IC2.18 IC2.19 IC2.20 IC2.21 IC2.22 IC2.49 IC2.50 IC2.53 IC2.54 IC2.55 IC2.56 IC2.57 IC2.69 IC2.86 IC2.87 IC2.88 IC2.89 IC2.90 IC2.91 IC2.92 IC2.93 IC2.96 IC2.97 IC2.98 IC2.99 IC2.100 IC2.101 IC2.102 IC2.103 IC2.104 IC2.106 IC2.110 IC2.111 IC2.112 IC2.113 IC2.114 IC2.115 IC2.116 IC2.117 IC2.118 IC2.119 IC2.122 IC2.123 IC2.124 IC2.125 IC2.126 IC2.127 IC2.128 IC2.129 IC2.132 IC2.136 IC2.137 IC2.139 IC2.140 IC2.141 IC2.142 IC3.1 IC3.2 IC3.3 IC3.4 IC3.5 IC3.6 IC3.7 IC3.8 IC3.9 IC3.10 IC3.11 IC3.13 IC3.15 IC3.18 IC3.19 IC3.20 IC3.21 IC3.22 IC3.49 IC3.50 IC3.53 IC3.54 IC3.55 IC3.56 IC3.57 IC3.69 IC3.86 IC3.87 IC3.88 IC3.89 IC3.90 IC3.91 IC3.92 IC3.93 IC3.96 IC3.97 IC3.98 IC3.99 IC3.100 IC3.101 IC3.102 IC3.103 IC3.104 IC3.106 IC3.110 IC3.111 IC3.112 IC3.113 IC3.114 IC3.115 IC3.116 IC3.117 IC3.118 IC3.119 IC3.122 IC3.123 IC3.124 IC3.125 IC3.126 IC3.127 IC3.128 IC3.129 IC3.132 IC3.136 IC3.137 IC3.139 IC3.140 IC3.141 IC3.142 IC4.1 IC4.2 IC4.3 IC4.4 IC4.5 IC4.6 IC4.7 IC4.8 IC4.9 IC4.10 IC4.11 IC4.13 IC4.15 IC4.18 IC4.19 IC4.20 IC4.21 IC4.22 IC4.49 IC4.50 IC4.53 IC4.54 IC4.55 IC4.56 IC4.57 IC4.69 IC4.86 IC4.87 IC4.88 IC4.89 IC4.90 IC4.91 IC4.92 IC4.93 IC4.96 IC4.97 IC4.98 IC4.99 IC4.100 IC4.101 IC4.102 IC4.103 IC4.104 IC4.106 IC4.110 IC4.111 IC4.112 IC4.113 IC4.114 IC4.115 IC4.116 IC4.117 IC4.118 IC4.119 IC4.122 IC4.123 IC4.124 IC4.125 IC4.126 IC4.127 IC4.128 IC4.129 IC4.132 IC4.136 IC4.137 IC4.139 IC4.140 IC4.141 IC4.142 IC5.1 IC5.2 IC5.3 IC5.4 IC5.5 IC5.6 IC5.7 IC5.8 IC5.9 IC5.10 IC5.11 IC5.13 IC5.15 IC5.18 IC5.19 IC5.20 IC5.21 IC5.22 IC5.49 IC5.50 IC5.53 IC5.54 IC5.55 IC5.56 IC5.57 IC5.69 IC5.86 IC5.87 IC5.88 IC5.89 IC5.90 IC5.91 IC5.92 IC5.93 IC5.96 IC5.97 IC5.98 IC5.99 IC5.100 IC5.101 IC5.102 IC5.103 IC5.104 IC5.106 IC5.110 IC5.111 IC5.112 IC5.113 IC5.114 IC5.115 IC5.116 IC5.117 IC5.118 IC5.119 IC5.122 IC5.123 IC5.124 IC5.125 IC5.126 IC5.127 IC5.128 IC5.129 IC5.132 IC5.136 IC5.137 IC5.139 IC5.140 IC5.141 IC5.142 PS1.3 PS1.8 PS1.9 PS1.10
copper on no net:
  other v1: 1.5,1.5 148.5,1.5 1.5,98.5 148.5,98.5

## Polygon pours and split planes (outlines as drawn)
no net on GND (split plane): 149.49,0.51 0.51,0.51 0.51,99.49 149.49,99.49
GND on GND (split plane): 148.371,1.629 1.629,1.629 1.629,98.371 148.371,98.371
no net on PWR (split plane): 149.49,0.51 0.51,0.51 0.51,99.49 149.49,99.49

## Other copper
GND (plane layer: these items are gaps in the copper):
  lines w0.254: 1.5,1.5 148.5,1.5 148.5,98.5 1.5,98.5 1.5,1.5

## Silkscreen, mask and mechanical layers (free items; w line width, h text height)
Mechanical 1:
  lines w0.254: -4.953,1.284 -4.445,-0.24 ; -4.953,98.236 -4.445,99.76 ; -4.699,-0.24 -4.191,-0.24 ; -4.699,99.76 -4.191,99.76 ; -4.445,44.022 -4.445,-0.24 ; -4.445,55.499 -4.445,99.76 ; -3.937,1.284 -4.445,-0.24 ; -3.937,98.236 -4.445,99.76 ; -0.021,-5.029 -0.021,-4.521 ; 1.503,-5.283 -0.021,-4.775 ; 1.503,-4.267 -0.021,-4.775 ; 69.24,-4.775 -0.021,-4.775 ; 80.718,-4.775 149.979,-4.775 ; 148.455,-5.283 149.979,-4.775 ; 148.455,-4.267 149.979,-4.775 ; 149.979,-5.029 149.979,-4.521 ; 0,0 150,0 150,100 0,100 0,0
  text "100 (mm)" at -3.531,44.276 h1.52 r90
  text "150 (mm)" at 69.494,-5.69 h1.52

## Text inside footprints (layer, text, board x,y; h text height)
M1: Mechanical 12 "1" at 140.335,10.414 h0.64
M2: Mechanical 12 "1" at 134.874,10.414 h0.64
M3: Mechanical 12 "1" at 129.413,10.414 h0.64
M4: Mechanical 12 "1" at 123.952,10.414 h0.64
P1: Top Overlay "1" at 32.715,12.065 h1 r180; Top Overlay "39" at 5.715,12.065 h1 r180
P2: Top Overlay "1" at 63.449,12.192 h1 r180; Top Overlay "39" at 36.449,12.192 h1 r180
P3: Top Overlay "1" at 95.834,9.525 h1 r180; Top Overlay "39" at 68.834,9.525 h1 r180
P4: Top Overlay "1" at 121.107,15.494 h1 r180; Top Overlay "39" at 94.107,15.494 h1 r180
P5: Top Overlay "1" at 145.745,20.574 h1 r180; Top Overlay "39" at 118.745,20.574 h1 r180